# Altium PCB Enigma Rev A.PcbDoc
Units mm, origin at the board's own origin, x right, y up, seen from the top; angles counter-clockwise.
Board outline 230 x 115 mm, 4 copper layers (Component Side, Ground Plane, Power Plane, Solder Side), stack 0.844 mm thick; 1 components, 0 nets, 310 pads, 0 vias.
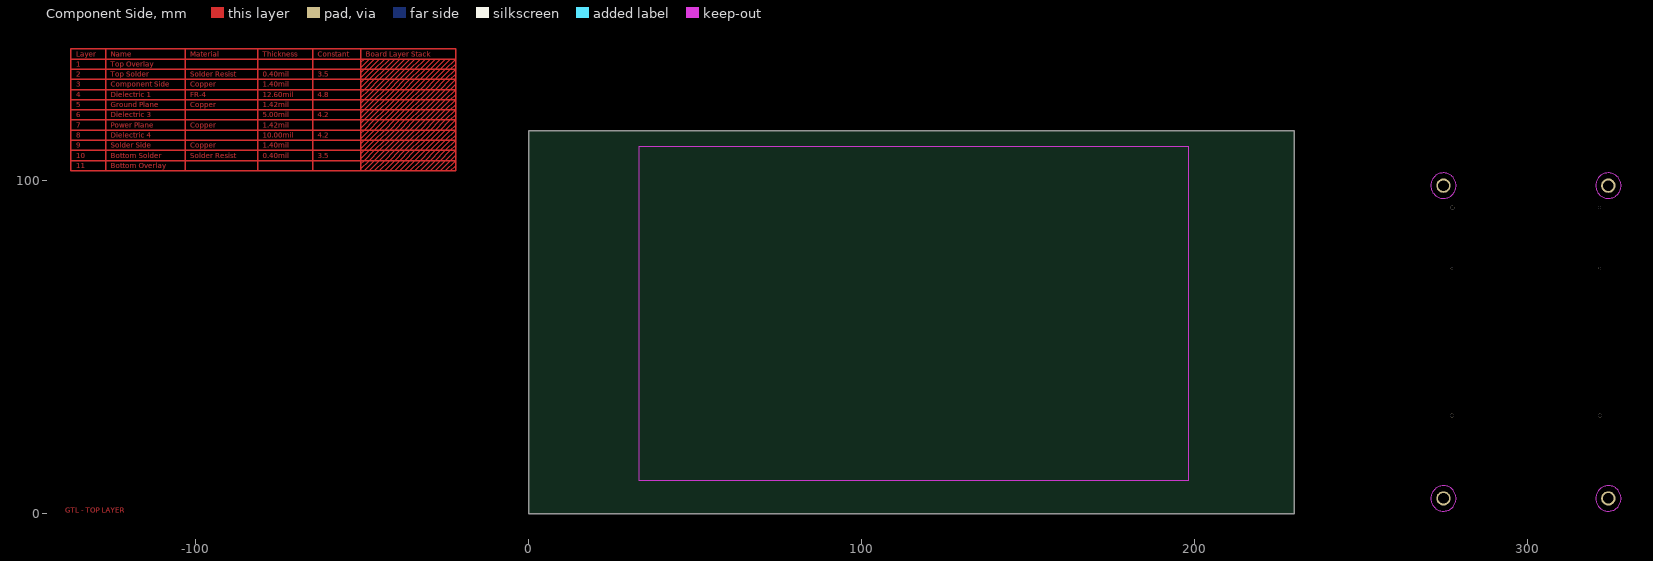
[diagram p0: Component Side view]
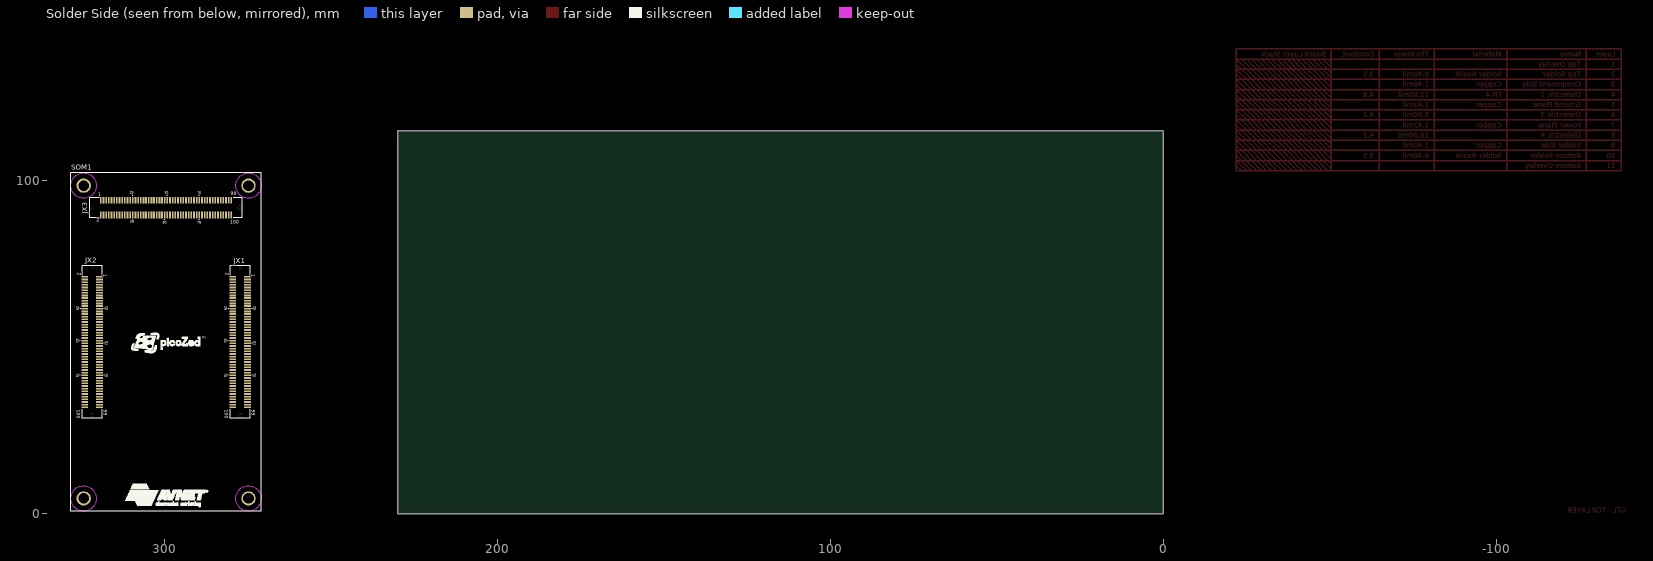
[diagram p1: Solder Side view, seen from below]
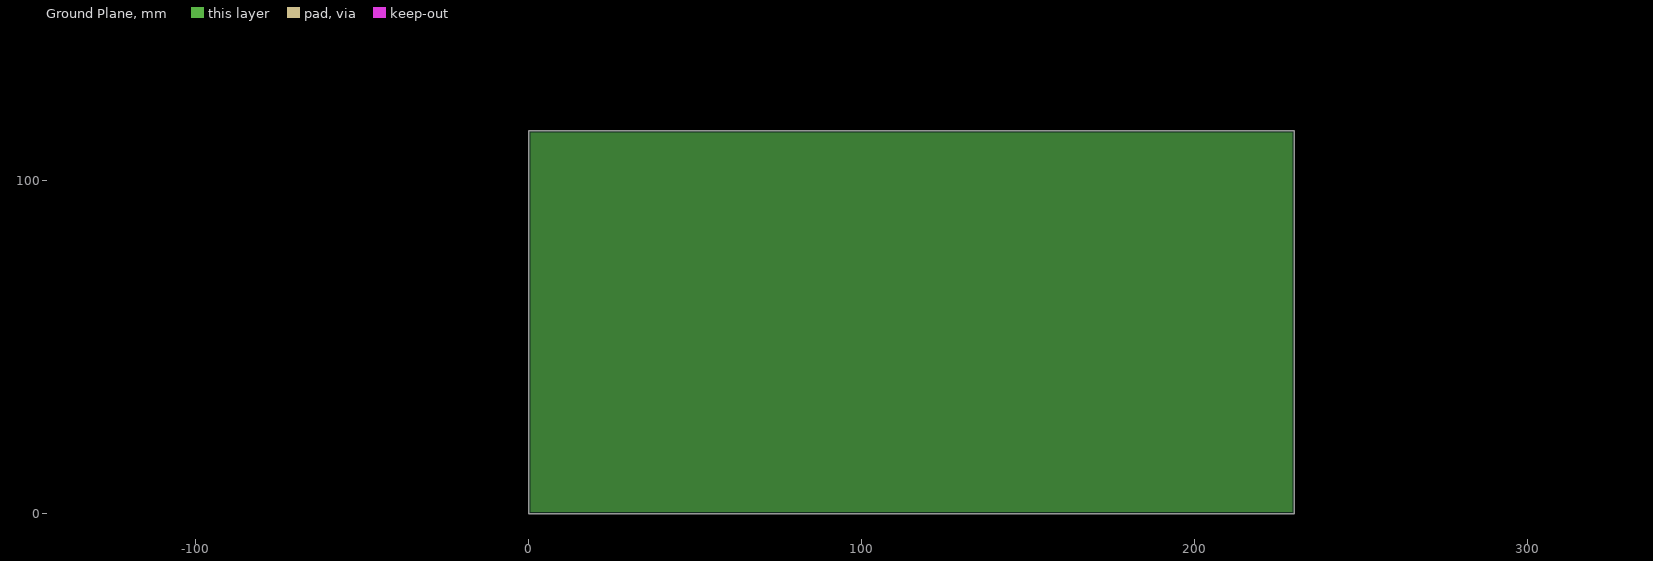
[diagram p2: Ground Plane, clearances drawn from the general rule]
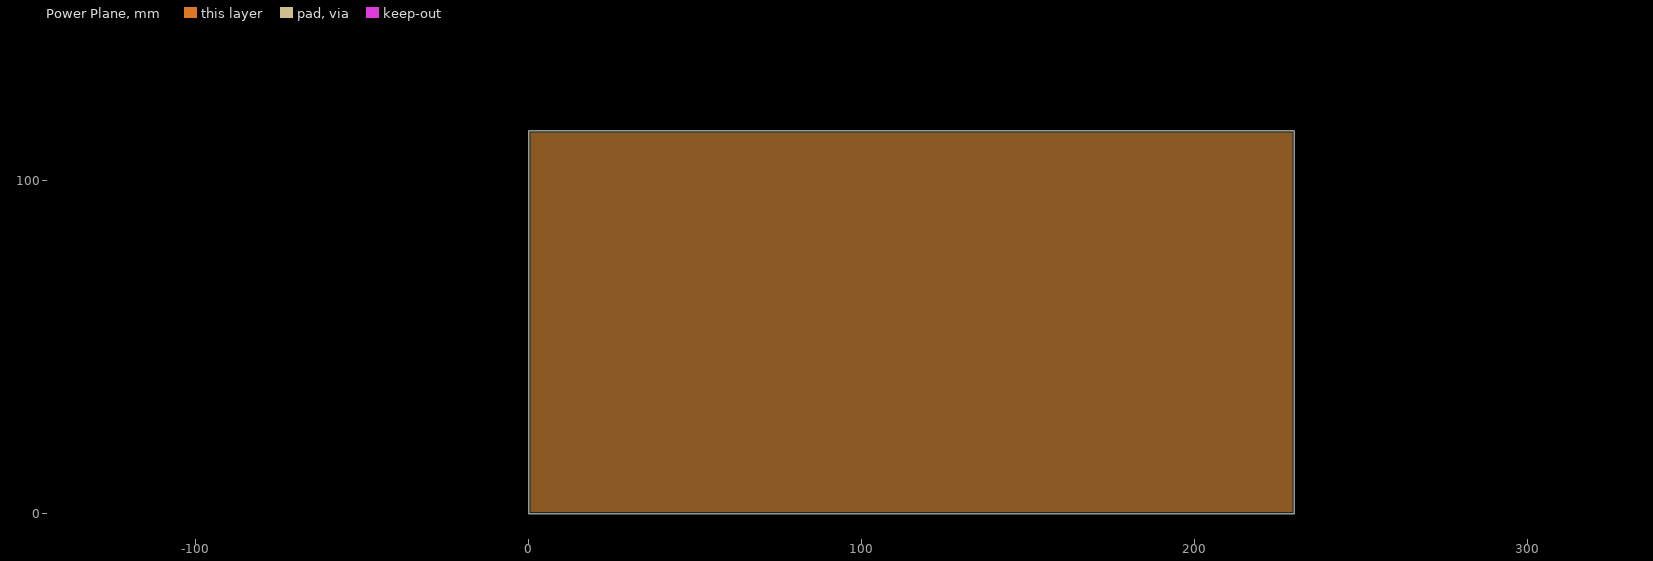
[diagram p3: Power Plane, clearances drawn from the general rule]

## Layer stack, top to bottom
Top Solder: solder mask 0.0102, Solder Resist, Dk 3.5
Component Side: signal copper 0.0356
Dielectric 1: core 0.32, FR-4, Dk 4.8
Ground Plane: plane copper 0.036
Dielectric 3: prepreg 0.127, Dk 4.2
Power Plane: plane copper 0.036
Dielectric 4: core 0.254, Dk 4.2
Solder Side: signal copper 0.0356
Bottom Solder: solder mask 0.0102, Solder Resist, Dk 3.5

## Board outline
0,0 230,0 230,115 0,115

## Design rules (kind name [scope] priority, off if disabled: settings)
Clearance [All] p1: gap=0.254 ignorepadtopadclearanceinfootprint=FALSE except(0: Arc-Hole Track-Hole SMDPad-Hole THPad-Hole Via-Hole Fill-Hole Poly-Hole Region-Hole Text-Hole)
PlaneClearance [All] p1: clearance=0.508
PlaneConnect [All] p1: planeconnectstyle=Relief reliefexpansion=0.508 reliefentries=4 reliefconductorwidth=0.254 reliefairgap=0.254
PolygonConnect [All] p1: connectstyle=Relief reliefconductorwidth=0.254 reliefentries=4 polygonreliefangle="90 Angle" airgapwidth=0.254
RoutingLayers [All] p1: top layer_v5=FALSE bottom layer_v5=TRUE
RoutingVias [All] p1: holewidth=0.711 width=1.27 viastyle="Through Hole" minholewidth=0.711 minwidth=1.27 maxholewidth=0.711 maxwidth=1.27
SolderMaskExpansion [All] p1: expansion=0.102
Width [All] p1: maxlimit=0.254 minlimit=0.254 preferedwidth=0.254
27 further rules are at their usual default settings.

## Components (designator, comment, footprint, x,y, rotation, side; value= is the part's Value field where it differs from the comment)
SOM1 "PicoZed" PicoZedSOM 328.14,0.72 r180 bottom

## Footprints (in the part's own frame and the unit in brackets; to place one, negate y for a bottom-side part, rotate by r counter-clockwise, add the part's x,y. Pads: shape width x height; smd on the part's side, far side on the other; paste and mask are expansions set on the pad)
PicoZedSOM [mil] "PicoZed SOM Footprint"
  round 170 hole 125: 0(150,150) 0(150,3850) 0(2100,150) 0(2100,3850)
  round 45.98 hole 47.99 unplated: 0(250.5,1130) 0(1995,3590) 0(2000.5,1130)
  round 30 hole 32.01 unplated: 0(250.5,2870) 0(255,3590) 0(2000.5,2870)
  rect 80x20 smd: JX1-1(2087.11,2771.65) JX1-2(1913.89,2771.65) JX1-3(2087.11,2740.16) JX1-4(1913.89,2740.16) JX1-5(2087.11,2708.66) JX1-6(1913.89,2708.66) JX1-7(2087.11,2677.17) JX1-8(1913.89,2677.17) JX1-9(2087.11,2645.67) JX1-10(1913.89,2645.67) JX1-11(2087.11,2614.17) JX1-12(1913.89,2614.17) JX1-13(2087.11,2582.68) JX1-14(1913.89,2582.68) JX1-15(2087.11,2551.18) JX1-16(1913.89,2551.18) JX1-17(2087.11,2519.68) JX1-18(1913.89,2519.69) JX1-19(2087.11,2488.19) JX1-20(1913.89,2488.19) JX1-21(2087.11,2456.69) JX1-22(1913.89,2456.69) JX1-23(2087.11,2425.2) JX1-24(1913.89,2425.2) JX1-25(2087.11,2393.7) JX1-26(1913.89,2393.7) JX1-27(2087.11,2362.2) JX1-28(1913.89,2362.21) JX1-29(2087.11,2330.71) JX1-30(1913.89,2330.71) JX1-31(2087.11,2299.21) JX1-32(1913.89,2299.21) JX1-33(2087.11,2267.72) JX1-34(1913.89,2267.72) JX1-35(2087.11,2236.22) JX1-36(1913.89,2236.22) JX1-37(2087.11,2204.72) JX1-38(1913.89,2204.73) JX1-39(2087.11,2173.23) JX1-40(1913.89,2173.23) JX1-41(2087.11,2141.73) JX1-42(1913.89,2141.73) JX1-43(2087.11,2110.24) JX1-44(1913.89,2110.24) JX1-45(2087.11,2078.74) JX1-46(1913.89,2078.74) JX1-47(2087.11,2047.24) JX1-48(1913.89,2047.25) JX1-49(2087.11,2015.75) JX1-50(1913.89,2015.75) JX1-51(2087.11,1984.25) JX1-52(1913.89,1984.25) JX1-53(2087.11,1952.76) JX1-54(1913.89,1952.76) JX1-55(2087.11,1921.26) JX1-56(1913.89,1921.26) JX1-57(2087.11,1889.76) JX1-58(1913.89,1889.77) JX1-59(2087.11,1858.27) JX1-60(1913.89,1858.27) JX1-61(2087.11,1826.77) JX1-62(1913.89,1826.77) JX1-63(2087.11,1795.28) JX1-64(1913.89,1795.28) JX1-65(2087.11,1763.78) JX1-66(1913.89,1763.78) JX1-67(2087.11,1732.28) JX1-68(1913.89,1732.29) JX1-69(2087.11,1700.79) JX1-70(1913.89,1700.79) JX1-71(2087.11,1669.29) JX1-72(1913.89,1669.29) JX1-73(2087.11,1637.8) JX1-74(1913.89,1637.8) JX1-75(2087.11,1606.3) JX1-76(1913.89,1606.3) JX1-77(2087.11,1574.8) JX1-78(1913.89,1574.81) JX1-79(2087.11,1543.31) JX1-80(1913.89,1543.31) JX1-81(2087.11,1511.81) JX1-82(1913.89,1511.81) JX1-83(2087.11,1480.31) JX1-84(1913.89,1480.32) JX1-85(2087.11,1448.82) JX1-86(1913.89,1448.82) JX1-87(2087.11,1417.32) JX1-88(1913.89,1417.33) JX1-89(2087.11,1385.83) JX1-90(1913.89,1385.83) JX1-91(2087.11,1354.33) JX1-92(1913.89,1354.33) JX1-93(2087.11,1322.83) JX1-94(1913.89,1322.84) JX1-95(2087.11,1291.34) JX1-96(1913.89,1291.34) JX1-97(2087.11,1259.84) JX1-98(1913.89,1259.85) JX1-99(2087.11,1228.35) JX1-100(1913.89,1228.35) JX2-1(337.11,2771.65) JX2-2(163.89,2771.65) JX2-3(337.11,2740.16) JX2-4(163.89,2740.16) JX2-5(337.11,2708.66) JX2-6(163.89,2708.66) JX2-7(337.11,2677.17) JX2-8(163.89,2677.17) JX2-9(337.11,2645.67) JX2-10(163.89,2645.67) JX2-11(337.11,2614.17) JX2-12(163.89,2614.17) JX2-13(337.11,2582.68) JX2-14(163.89,2582.68) JX2-15(337.11,2551.18) JX2-16(163.89,2551.18) JX2-17(337.11,2519.68) JX2-18(163.89,2519.69) JX2-19(337.11,2488.19) JX2-20(163.89,2488.19) JX2-21(337.11,2456.69) JX2-22(163.89,2456.69) JX2-23(337.11,2425.2) JX2-24(163.89,2425.2) JX2-25(337.11,2393.7) JX2-26(163.89,2393.7) JX2-27(337.11,2362.2) JX2-28(163.89,2362.21) JX2-29(337.11,2330.71) JX2-30(163.89,2330.71) JX2-31(337.11,2299.21) JX2-32(163.89,2299.21) JX2-33(337.11,2267.72) JX2-34(163.89,2267.72) JX2-35(337.11,2236.22) JX2-36(163.89,2236.22) JX2-37(337.11,2204.72) JX2-38(163.89,2204.73) JX2-39(337.11,2173.23) JX2-40(163.89,2173.23) JX2-41(337.11,2141.73) JX2-42(163.89,2141.73) JX2-43(337.11,2110.24) JX2-44(163.89,2110.24) JX2-45(337.11,2078.74) JX2-46(163.89,2078.74) JX2-47(337.11,2047.24) JX2-48(163.89,2047.25) JX2-49(337.11,2015.75) JX2-50(163.89,2015.75) JX2-51(337.11,1984.25) JX2-52(163.89,1984.25) JX2-53(337.11,1952.76) JX2-54(163.89,1952.76) JX2-55(337.11,1921.26) JX2-56(163.89,1921.26) JX2-57(337.11,1889.76) JX2-58(163.89,1889.77) JX2-59(337.11,1858.27) JX2-60(163.89,1858.27) JX2-61(337.11,1826.77) JX2-62(163.89,1826.77) JX2-63(337.11,1795.28) JX2-64(163.89,1795.28) JX2-65(337.11,1763.78) JX2-66(163.89,1763.78) JX2-67(337.11,1732.28) JX2-68(163.89,1732.29) JX2-69(337.11,1700.79) JX2-70(163.89,1700.79) JX2-71(337.11,1669.29) JX2-72(163.89,1669.29) JX2-73(337.11,1637.8) JX2-74(163.89,1637.8) JX2-75(337.11,1606.3) JX2-76(163.89,1606.3) JX2-77(337.11,1574.8) JX2-78(163.89,1574.81) JX2-79(337.11,1543.31) JX2-80(163.89,1543.31) JX2-81(337.11,1511.81) JX2-82(163.89,1511.81) JX2-83(337.11,1480.31) JX2-84(163.89,1480.32) JX2-85(337.11,1448.82) JX2-86(163.89,1448.82) JX2-87(337.11,1417.32) JX2-88(163.89,1417.33) JX2-89(337.11,1385.83) JX2-90(163.89,1385.83) JX2-91(337.11,1354.33) JX2-92(163.89,1354.33) JX2-93(337.11,1322.83) JX2-94(163.89,1322.84) JX2-95(337.11,1291.34) JX2-96(163.89,1291.34) JX2-97(337.11,1259.84) JX2-98(163.89,1259.85) JX2-99(337.11,1228.35) JX2-100(163.89,1228.35)
  rect 20x80 smd: JX3-1(353.35,3676.61) JX3-2(353.35,3503.39) JX3-3(384.84,3676.61) JX3-4(384.84,3503.39) JX3-5(416.34,3676.61) JX3-6(416.34,3503.39) JX3-7(447.83,3676.61) JX3-8(447.83,3503.39) JX3-9(479.33,3676.61) JX3-10(479.33,3503.39) JX3-11(510.83,3676.61) JX3-12(510.83,3503.39) JX3-13(542.32,3676.61) JX3-14(542.32,3503.39) JX3-15(573.82,3676.61) JX3-16(573.82,3503.39) JX3-17(605.31,3676.61) JX3-18(605.31,3503.39) JX3-19(636.81,3676.61) JX3-20(636.81,3503.39) JX3-21(668.31,3676.61) JX3-22(668.31,3503.39) JX3-23(699.8,3676.61) JX3-24(699.8,3503.39) JX3-25(731.3,3676.61) JX3-26(731.3,3503.39) JX3-27(762.8,3676.61) JX3-28(762.79,3503.39) JX3-29(794.29,3676.61) JX3-30(794.29,3503.39) JX3-31(825.79,3676.61) JX3-32(825.79,3503.39) JX3-33(857.28,3676.61) JX3-34(857.28,3503.39) JX3-35(888.78,3676.61) JX3-36(888.78,3503.39) JX3-37(920.28,3676.61) JX3-38(920.27,3503.39) JX3-39(951.77,3676.61) JX3-40(951.77,3503.39) JX3-41(983.27,3676.61) JX3-42(983.27,3503.39) JX3-43(1014.76,3676.61) JX3-44(1014.76,3503.39) JX3-45(1046.26,3676.61) JX3-46(1046.26,3503.39) JX3-47(1077.76,3676.61) JX3-48(1077.75,3503.39) JX3-49(1109.25,3676.61) JX3-50(1109.25,3503.39) JX3-51(1140.75,3676.61) JX3-52(1140.75,3503.39) JX3-53(1172.24,3676.61) JX3-54(1172.24,3503.39) JX3-55(1203.74,3676.61) JX3-56(1203.74,3503.39) JX3-57(1235.24,3676.61) JX3-58(1235.23,3503.39) JX3-59(1266.73,3676.61) JX3-60(1266.73,3503.39) JX3-61(1298.23,3676.61) JX3-62(1298.23,3503.39) JX3-63(1329.72,3676.61) JX3-64(1329.72,3503.39) JX3-65(1361.22,3676.61) JX3-66(1361.22,3503.39) JX3-67(1392.72,3676.61) JX3-68(1392.71,3503.39) JX3-69(1424.21,3676.61) JX3-70(1424.21,3503.39) JX3-71(1455.71,3676.61) JX3-72(1455.71,3503.39) JX3-73(1487.2,3676.61) JX3-74(1487.2,3503.39) JX3-75(1518.7,3676.61) JX3-76(1518.7,3503.39) JX3-77(1550.2,3676.61) JX3-78(1550.19,3503.39) JX3-79(1581.69,3676.61) JX3-80(1581.69,3503.39) JX3-81(1613.19,3676.61) JX3-82(1613.19,3503.39) JX3-83(1644.69,3676.61) JX3-84(1644.68,3503.39) JX3-85(1676.18,3676.61) JX3-86(1676.18,3503.39) JX3-87(1707.68,3676.61) JX3-88(1707.67,3503.39) JX3-89(1739.17,3676.61) JX3-90(1739.17,3503.39) JX3-91(1770.67,3676.61) JX3-92(1770.67,3503.39) JX3-93(1802.17,3676.61) JX3-94(1802.16,3503.39) JX3-95(1833.66,3676.61) JX3-96(1833.66,3503.39) JX3-97(1865.16,3676.61) JX3-98(1865.15,3503.39) JX3-99(1896.65,3676.61) JX3-100(1896.65,3503.39)
  Component Side keep-out circle w4: c2100,150 r150
  Component Side keep-out circle w4: c150,3850 r150
  Component Side keep-out circle w4: c2100,3850 r150
  Component Side keep-out circle w4: c150,150 r150
  Solder Side keep-out circle w4: c2100,150 r150
  Solder Side keep-out circle w4: c150,3850 r150
  Solder Side keep-out circle w4: c2100,3850 r150
  Solder Side keep-out circle w4: c150,150 r150
  silkscreen extent 0,0 2250,4000, body extent -1,0 2250,4000, height 186

## Part data
SOM1: library part PicoZed_SOM, "PicoZed SOM Carrier Footprint"

## Nets (pads, with @x,y where several pads share a name; then routed paths per layer and width w, separated by ;. In a path a pad name is that pad's centre, name@x,y a point inside that pad or via, vN(x,y) a via of type N, cw(c..) or ccw(c..) an arc to the next point about the centre after c; other vN are vias at no path point)
pads on no net: SOM1.0 SOM1.JX1-1 SOM1.JX1-2 SOM1.JX1-3 SOM1.JX1-4 SOM1.JX1-5 SOM1.JX1-6 SOM1.JX1-7 SOM1.JX1-8 SOM1.JX1-9 SOM1.JX1-10 SOM1.JX1-11 SOM1.JX1-12 SOM1.JX1-13 SOM1.JX1-14 SOM1.JX1-15 SOM1.JX1-16 SOM1.JX1-17 SOM1.JX1-18 SOM1.JX1-19 SOM1.JX1-20 SOM1.JX1-21 SOM1.JX1-22 SOM1.JX1-23 SOM1.JX1-24 SOM1.JX1-25 SOM1.JX1-26 SOM1.JX1-27 SOM1.JX1-28 SOM1.JX1-29 SOM1.JX1-30 SOM1.JX1-31 SOM1.JX1-32 SOM1.JX1-33 SOM1.JX1-34 SOM1.JX1-35 SOM1.JX1-36 SOM1.JX1-37 SOM1.JX1-38 SOM1.JX1-39 SOM1.JX1-40 SOM1.JX1-41 SOM1.JX1-42 SOM1.JX1-43 SOM1.JX1-44 SOM1.JX1-45 SOM1.JX1-46 SOM1.JX1-47 SOM1.JX1-48 SOM1.JX1-49 SOM1.JX1-50 SOM1.JX1-51 SOM1.JX1-52 SOM1.JX1-53 SOM1.JX1-54 SOM1.JX1-55 SOM1.JX1-56 SOM1.JX1-57 SOM1.JX1-58 SOM1.JX1-59 SOM1.JX1-60 SOM1.JX1-61 SOM1.JX1-62 SOM1.JX1-63 SOM1.JX1-64 SOM1.JX1-65 SOM1.JX1-66 SOM1.JX1-67 SOM1.JX1-68 SOM1.JX1-69 SOM1.JX1-70 SOM1.JX1-71 SOM1.JX1-72 SOM1.JX1-73 SOM1.JX1-74 SOM1.JX1-75 SOM1.JX1-76 SOM1.JX1-77 SOM1.JX1-78 SOM1.JX1-79 SOM1.JX1-80 SOM1.JX1-81 SOM1.JX1-82 SOM1.JX1-83 SOM1.JX1-84 SOM1.JX1-85 SOM1.JX1-86 SOM1.JX1-87 SOM1.JX1-88 SOM1.JX1-89 SOM1.JX1-90 SOM1.JX1-91 SOM1.JX1-92 SOM1.JX1-93 SOM1.JX1-94 SOM1.JX1-95 SOM1.JX1-96 SOM1.JX1-97 SOM1.JX1-98 SOM1.JX1-99 SOM1.JX1-100 SOM1.JX2-1 SOM1.JX2-2 SOM1.JX2-3 SOM1.JX2-4 SOM1.JX2-5 SOM1.JX2-6 SOM1.JX2-7 SOM1.JX2-8 SOM1.JX2-9 SOM1.JX2-10 SOM1.JX2-11 SOM1.JX2-12 SOM1.JX2-13 SOM1.JX2-14 SOM1.JX2-15 SOM1.JX2-16 SOM1.JX2-17 SOM1.JX2-18 SOM1.JX2-19 SOM1.JX2-20 SOM1.JX2-21 SOM1.JX2-22 SOM1.JX2-23 SOM1.JX2-24 SOM1.JX2-25 SOM1.JX2-26 SOM1.JX2-27 SOM1.JX2-28 SOM1.JX2-29 SOM1.JX2-30 SOM1.JX2-31 SOM1.JX2-32 SOM1.JX2-33 SOM1.JX2-34 SOM1.JX2-35 SOM1.JX2-36 SOM1.JX2-37 SOM1.JX2-38 SOM1.JX2-39 SOM1.JX2-40 SOM1.JX2-41 SOM1.JX2-42 SOM1.JX2-43 SOM1.JX2-44 SOM1.JX2-45 SOM1.JX2-46 SOM1.JX2-47 SOM1.JX2-48 SOM1.JX2-49 SOM1.JX2-50 SOM1.JX2-51 SOM1.JX2-52 SOM1.JX2-53 SOM1.JX2-54 SOM1.JX2-55 SOM1.JX2-56 SOM1.JX2-57 SOM1.JX2-58 SOM1.JX2-59 SOM1.JX2-60 SOM1.JX2-61 SOM1.JX2-62 SOM1.JX2-63 SOM1.JX2-64 SOM1.JX2-65 SOM1.JX2-66 SOM1.JX2-67 SOM1.JX2-68 SOM1.JX2-69 SOM1.JX2-70 SOM1.JX2-71 SOM1.JX2-72 SOM1.JX2-73 SOM1.JX2-74 SOM1.JX2-75 SOM1.JX2-76 SOM1.JX2-77 SOM1.JX2-78 SOM1.JX2-79 SOM1.JX2-80 SOM1.JX2-81 SOM1.JX2-82 SOM1.JX2-83 SOM1.JX2-84 SOM1.JX2-85 SOM1.JX2-86 SOM1.JX2-87 SOM1.JX2-88 SOM1.JX2-89 SOM1.JX2-90 SOM1.JX2-91 SOM1.JX2-92 SOM1.JX2-93 SOM1.JX2-94 SOM1.JX2-95 SOM1.JX2-96 SOM1.JX2-97 SOM1.JX2-98 SOM1.JX2-99 SOM1.JX2-100 SOM1.JX3-1 SOM1.JX3-2 SOM1.JX3-3 SOM1.JX3-4 SOM1.JX3-5 SOM1.JX3-6 SOM1.JX3-7 SOM1.JX3-8 SOM1.JX3-9 SOM1.JX3-10 SOM1.JX3-11 SOM1.JX3-12 SOM1.JX3-13 SOM1.JX3-14 SOM1.JX3-15 SOM1.JX3-16 SOM1.JX3-17 SOM1.JX3-18 SOM1.JX3-19 SOM1.JX3-20 SOM1.JX3-21 SOM1.JX3-22 SOM1.JX3-23 SOM1.JX3-24 SOM1.JX3-25 SOM1.JX3-26 SOM1.JX3-27 SOM1.JX3-28 SOM1.JX3-29 SOM1.JX3-30 SOM1.JX3-31 SOM1.JX3-32 SOM1.JX3-33 SOM1.JX3-34 SOM1.JX3-35 SOM1.JX3-36 SOM1.JX3-37 SOM1.JX3-38 SOM1.JX3-39 SOM1.JX3-40 SOM1.JX3-41 SOM1.JX3-42 SOM1.JX3-43 SOM1.JX3-44 SOM1.JX3-45 SOM1.JX3-46 SOM1.JX3-47 SOM1.JX3-48 SOM1.JX3-49 SOM1.JX3-50 SOM1.JX3-51 SOM1.JX3-52 SOM1.JX3-53 SOM1.JX3-54 SOM1.JX3-55 SOM1.JX3-56 SOM1.JX3-57 SOM1.JX3-58 SOM1.JX3-59 SOM1.JX3-60 SOM1.JX3-61 SOM1.JX3-62 SOM1.JX3-63 SOM1.JX3-64 SOM1.JX3-65 SOM1.JX3-66 SOM1.JX3-67 SOM1.JX3-68 SOM1.JX3-69 SOM1.JX3-70 SOM1.JX3-71 SOM1.JX3-72 SOM1.JX3-73 SOM1.JX3-74 SOM1.JX3-75 SOM1.JX3-76 SOM1.JX3-77 SOM1.JX3-78 SOM1.JX3-79 SOM1.JX3-80 SOM1.JX3-81 SOM1.JX3-82 SOM1.JX3-83 SOM1.JX3-84 SOM1.JX3-85 SOM1.JX3-86 SOM1.JX3-87 SOM1.JX3-88 SOM1.JX3-89 SOM1.JX3-90 SOM1.JX3-91 SOM1.JX3-92 SOM1.JX3-93 SOM1.JX3-94 SOM1.JX3-95 SOM1.JX3-96 SOM1.JX3-97 SOM1.JX3-98 SOM1.JX3-99 SOM1.JX3-100
copper on no net: | length 2642.9
  Component Side w0.025: -50.419,103.505 -47.887,106.037 -44.839,109.085 -41.791,112.133 -38.743,115.181 -35.695,118.229 -32.647,121.277 -29.599,124.325 -26.551,127.373 -23.503,130.421 -21.979,131.945 ; -50.419,105.029 -49.411,106.037 -46.363,109.085 -43.315,112.133 -40.267,115.181 -37.219,118.229 -34.171,121.277 -31.123,124.325 -28.075,127.373 -25.027,130.421 -21.979,133.469 ; -50.419,106.553 -47.887,109.085 -44.839,112.133 -41.791,115.181 -38.743,118.229 -35.695,121.277 -32.647,124.325 -29.599,127.373 -26.551,130.421 -23.503,133.469 -21.979,134.993 ; -50.419,108.077 -49.411,109.085 -46.363,112.133 -43.315,115.181 -40.267,118.229 -37.219,121.277 -34.171,124.325 -31.123,127.373 -28.075,130.421 -25.027,133.469 -21.979,136.517 ; -50.419,109.601 -47.887,112.133 -44.839,115.181 -41.791,118.229 -38.743,121.277 -35.695,124.325 -32.647,127.373 -29.599,130.421 -26.551,133.469 -23.503,136.517 ; -50.419,111.125 -49.411,112.133 -46.363,115.181 -43.315,118.229 -40.267,121.277 -37.219,124.325 -34.171,127.373 -31.123,130.421 -28.075,133.469 -25.027,136.517 ; -50.419,112.649 -47.887,115.181 -44.839,118.229 -41.791,121.277 -38.743,124.325 -35.695,127.373 -32.647,130.421 -29.599,133.469 -26.551,136.517 ; -50.419,114.173 -49.411,115.181 -46.363,118.229 -43.315,121.277 -40.267,124.325 -37.219,127.373 -34.171,130.421 -31.123,133.469 -28.075,136.517 ; -50.419,115.697 -47.887,118.229 -44.839,121.277 -41.791,124.325 -38.743,127.373 -35.695,130.421 -32.647,133.469 -29.599,136.517 ; -50.419,117.221 -49.411,118.229 -46.363,121.277 -43.315,124.325 -40.267,127.373 -37.219,130.421 -34.171,133.469 -31.123,136.517 ; -50.419,118.745 -47.887,121.277 -44.839,124.325 -41.791,127.373 -38.743,130.421 -35.695,133.469 -32.647,136.517 ; -50.419,120.269 -49.411,121.277 -46.363,124.325 -43.315,127.373 -40.267,130.421 -37.219,133.469 -34.171,136.517 ; -50.419,121.793 -47.887,124.325 -44.839,127.373 -41.791,130.421 -38.743,133.469 -35.695,136.517 ; -50.419,123.317 -49.411,124.325 -46.363,127.373 -43.315,130.421 -40.267,133.469 -37.219,136.517 ; -50.419,124.841 -47.887,127.373 -44.839,130.421 -41.791,133.469 -38.743,136.517 ; -50.419,126.365 -49.411,127.373 -46.363,130.421 -43.315,133.469 -40.267,136.517 ; -50.419,127.889 -47.887,130.421 -44.839,133.469 -41.791,136.517 ; -50.419,129.413 -49.411,130.421 -46.363,133.469 -43.315,136.517 ; -50.419,130.937 -47.887,133.469 -44.839,136.517 ; -50.419,132.461 -49.411,133.469 -46.363,136.517 ; -50.419,133.985 -47.887,136.517 ; -50.419,135.509 -49.411,136.517 ; -49.411,102.989 -46.363,106.037 -43.315,109.085 -40.267,112.133 -37.219,115.181 -34.171,118.229 -31.123,121.277 -28.075,124.325 -25.027,127.373 -21.979,130.421 ; -47.887,102.989 -44.839,106.037 -41.791,109.085 -38.743,112.133 -35.695,115.181 -32.647,118.229 -29.599,121.277 -26.551,124.325 -23.503,127.373 -21.979,128.897 ; -46.363,102.989 -43.315,106.037 -40.267,109.085 -37.219,112.133 -34.171,115.181 -31.123,118.229 -28.075,121.277 -25.027,124.325 -21.979,127.373 ; -44.839,102.989 -41.791,106.037 -38.743,109.085 -35.695,112.133 -32.647,115.181 -29.599,118.229 -26.551,121.277 -23.503,124.325 -21.979,125.849 ; -43.315,102.989 -40.267,106.037 -37.219,109.085 -34.171,112.133 -31.123,115.181 -28.075,118.229 -25.027,121.277 -21.979,124.325 ; -41.791,102.989 -38.743,106.037 -35.695,109.085 -32.647,112.133 -29.599,115.181 -26.551,118.229 -23.503,121.277 -21.979,122.801 ; -40.267,102.989 -37.219,106.037 -34.171,109.085 -31.123,112.133 -28.075,115.181 -25.027,118.229 -21.979,121.277 ; -38.743,102.989 -35.695,106.037 -32.647,109.085 -29.599,112.133 -26.551,115.181 -23.503,118.229 -21.979,119.753 ; -37.219,102.989 -34.171,106.037 -31.123,109.085 -28.075,112.133 -25.027,115.181 -21.979,118.229 ; -35.695,102.989 -32.647,106.037 -29.599,109.085 -26.551,112.133 -23.503,115.181 -21.979,116.705 ; -34.171,102.989 -31.123,106.037 -28.075,109.085 -25.027,112.133 -21.979,115.181 ; -32.647,102.989 -29.599,106.037 -26.551,109.085 -23.503,112.133 -21.979,113.657 ; -31.123,102.989 -28.075,106.037 -25.027,109.085 -21.979,112.133 ; -29.599,102.989 -26.551,106.037 -23.503,109.085 -21.979,110.609 ; -28.075,102.989 -25.027,106.037 -21.979,109.085 ; -26.551,102.989 -23.503,106.037 -21.979,107.561 ; -25.027,102.989 -21.979,106.037 ; -23.503,102.989 -21.979,104.513
  Component Side w0.381: -137.519,106.037 -127.107,106.037 -103.237,106.037 -81.399,106.037 -64.893,106.037 -50.419,106.037 -21.979,106.037 ; -137.519,109.085 -127.107,109.085 -103.237,109.085 -81.399,109.085 -64.893,109.085 -50.419,109.085 -21.979,109.085 ; -137.519,112.133 -127.107,112.133 -103.237,112.133 -81.399,112.133 -64.893,112.133 -50.419,112.133 -21.979,112.133 ; -137.519,115.181 -127.107,115.181 -103.237,115.181 -81.399,115.181 -64.893,115.181 -50.419,115.181 -21.979,115.181 ; -137.519,118.229 -127.107,118.229 -103.237,118.229 -81.399,118.229 -64.893,118.229 -50.419,118.229 -21.979,118.229 ; -137.519,121.277 -127.107,121.277 -103.237,121.277 -81.399,121.277 -64.893,121.277 -50.419,121.277 -21.979,121.277 ; -137.519,124.325 -127.107,124.325 -103.237,124.325 -81.399,124.325 -64.893,124.325 -50.419,124.325 -21.979,124.325 ; -137.519,127.373 -127.107,127.373 -103.237,127.373 -81.399,127.373 -64.893,127.373 -50.419,127.373 -21.979,127.373 ; -137.519,130.421 -127.107,130.421 -103.237,130.421 -81.399,130.421 -64.893,130.421 -50.419,130.421 -21.979,130.421 ; -137.519,133.469 -127.107,133.469 -103.237,133.469 -81.399,133.469 -64.893,133.469 -50.419,133.469 -21.979,133.469 ; -137.519,136.517 -21.979,136.517 ; -127.107,139.565 -127.107,102.989 ; -103.237,139.565 -103.237,102.989 ; -81.399,139.565 -81.399,102.989 ; -64.893,139.565 -64.893,102.989 ; -50.419,139.565 -50.419,102.989 ; -127.107,102.989 -103.237,102.989 ; -127.107,102.989 -137.519,102.989 -137.519,139.565 -21.979,139.565 -21.979,102.989 -50.419,102.989 ; -103.237,102.989 -81.399,102.989 ; -81.399,102.989 -64.893,102.989 ; -64.893,102.989 -50.419,102.989

## Polygon pours and split planes (outlines as drawn)
no net on Ground Plane (split plane): 229.49,114.49 229.49,0.51 0.51,0.51 0.51,114.49
no net on Power Plane (split plane): 229.49,114.49 229.49,0.51 0.51,0.51 0.51,114.49

## Keep-outs
Component Side:
  rectangle: 33,10 198.2,110.2

## Other copper
Component Side:
  text "Layer" at -135.995,137.279 h1.52
  text "Name" at -125.583,137.279 h1.52
  text "Material" at -101.713,137.279 h1.52
  text "Thickness" at -79.875,137.279 h1.52
  text "Constant" at -63.369,137.279 h1.52
  text "Board Layer Stack" at -48.895,137.279 h1.52
  text "1" at -135.995,134.231 h1.52
  text "Top Overlay" at -125.583,134.231 h1.52
  text "2" at -135.995,131.183 h1.52
  text "Top Solder" at -125.583,131.183 h1.52
  text "Solder Resist" at -101.713,131.183 h1.52
  text "0.40mil" at -79.875,131.183 h1.52
  text "3.5" at -63.369,131.183 h1.52
  text "3" at -135.995,128.135 h1.52
  text "Component Side" at -125.583,128.135 h1.52
  text "Copper" at -101.713,128.135 h1.52
  text "1.40mil" at -79.875,128.135 h1.52
  text "4" at -135.995,125.087 h1.52
  text "Dielectric 1" at -125.583,125.087 h1.52
  text "FR-4" at -101.713,125.087 h1.52
  text "12.60mil" at -79.875,125.087 h1.52
  text "4.8" at -63.369,125.087 h1.52
  text "5" at -135.995,122.039 h1.52
  text "Ground Plane" at -125.583,122.039 h1.52
  text "Copper" at -101.713,122.039 h1.52
  text "1.42mil" at -79.875,122.039 h1.52
  text "6" at -135.995,118.991 h1.52
  text "Dielectric 3" at -125.583,118.991 h1.52
  text "5.00mil" at -79.875,118.991 h1.52
  text "4.2" at -63.369,118.991 h1.52
  text "7" at -135.995,115.943 h1.52
  text "Power Plane" at -125.583,115.943 h1.52
  text "Copper" at -101.713,115.943 h1.52
  text "1.42mil" at -79.875,115.943 h1.52
  text "8" at -135.995,112.895 h1.52
  text "Dielectric 4" at -125.583,112.895 h1.52
  text "10.00mil" at -79.875,112.895 h1.52
  text "4.2" at -63.369,112.895 h1.52
  text "9" at -135.995,109.847 h1.52
  text "Solder Side" at -125.583,109.847 h1.52
  text "Copper" at -101.713,109.847 h1.52
  text "1.40mil" at -79.875,109.847 h1.52
  text "10" at -135.995,106.799 h1.52
  text "Bottom Solder" at -125.583,106.799 h1.52
  text "Solder Resist" at -101.713,106.799 h1.52
  text "0.40mil" at -79.875,106.799 h1.52
  text "3.5" at -63.369,106.799 h1.52
  text "11" at -135.995,103.751 h1.52
  text "Bottom Overlay" at -125.583,103.751 h1.52
  text "GTL - TOP LAYER" at -139.3,0.26 h1.52
Solder Side:
  text "GBL - BOTTOM LAYER" at -139.3,-20.24 h1.52
Ground Plane (plane layer: these items are gaps in the copper):
  text "GP1 - GROUND PLANE 1" at -138.938,-7.137 h1.52
Power Plane (plane layer: these items are gaps in the copper):
  text "GP2 - POWER PLANE 1" at -139.3,-9.74 h1.52
Multi-Layer:
  text "MULTI-LAYER HOLES" at -70.637,-40.361 h1.52

## Silkscreen, mask and mechanical layers (free items; w line width, h text height)
Mechanical 2:
  circle w0.152: c215.9,12.7 r2.54
  circle w0.152: c215.9,12.7 r5.08
  circle w0.152: c215.9,12.7 r7.62
  circle w0.152: c215.9,165.1 r2.54
  circle w0.152: c215.9,165.1 r5.08
  circle w0.152: c215.9,165.1 r7.62
  circle w0.152: c-114.3,165.1 r2.54
  circle w0.152: c-114.3,165.1 r5.08
  circle w0.152: c-114.3,165.1 r7.62
  lines w0.102: -127,165.1 -114.3,165.1 ; -114.3,152.4 -114.3,165.1 ; -114.3,177.8 -114.3,165.1 ; -101.6,165.1 -114.3,165.1 ; 203.2,12.7 215.9,12.7 ; 203.2,165.1 215.9,165.1 ; 215.9,0 215.9,12.7 ; 215.9,25.4 215.9,12.7 ; 215.9,152.4 215.9,165.1 ; 215.9,177.8 215.9,165.1 ; 228.6,12.7 215.9,12.7 ; 228.6,165.1 215.9,165.1
  text "02 PCB BOUNDRY" at -70.637,2.794 h1.52
Mechanical 3:
  text "03" at -70.637,0.254 h1.52
Mechanical 4:
  text "04" at -70.637,-2.286 h1.52
Mechanical 5:
  text "05" at -70.637,-4.826 h1.52
Mechanical 6:
  lines w0.508: -140.973,61.394 -46.223,61.394
  text "FAB NOTES: UNLESS OTHERWISE SPECIFIED" at -140.973,62.144 h1.52
  text "1) MATERIAL: GLASS EPOXY FR-4, UL 94V-0" at -141.045,58.554 h1.52
  text "2) FINISH - ENIG" at -141.045,55.011 h1.52
  text "3) HOLE DIAMETERS APPLY AFTER PLATING" at -141.021,51.976 h1.52
  text "4) SILKSREEN: WHITE EPOXY - BOTH SIDES" at -140.791,48.941 h1.52
  text "5) LAYER TO LAYER REGISTRATION: TO BE WITHIN +/- 0.003" at -140.791,45.906 h1.52
  text "6) ALL HOLES TO BE LOCATED WITHIN +/- 0.003 TRUE POSITION" at -140.791,42.871 h1.52
  text "7) TOLERANCES: .XX = +/- 0.02, .XXX = +/- 0.005" at -140.791,40.343 h1.52
  text "8) ALL DIMENSIONS IN INCHES" at -140.791,36.801 h1.52
  text "9) MIN TRACE WIDTH: 6MIL" at -140.791,33.765 h1.52
  text "10) MIN CLEARANCE: 6MIL" at -140.791,30.73 h1.52
  text "11) PLATE EDGE CONNECTORS PER IPC-6012 LATEST REVISION" at -140.791,27.695 h1.52
  text "12) OVERALL BOARD HEIGHT: 62MILS" at -140.791,24.66 h1.52
  text "15.) 20MIL PULLBACK ON INNER PLANES" at -140.791,21.625 h1.52
  text "06 FABRICATION NOTES" at -70.637,-7.366 h1.52
Mechanical 8:
  text "08" at -70.637,-12.446 h1.52
Mechanical 9:
  text "09" at -70.637,-14.986 h1.52
Mechanical 10:
  text "10" at -70.637,-17.526 h1.52
Mechanical 11:
  text "11 DESIGN INFORMATION" at -70.637,-20.066 h1.52
Mechanical 14:
  text "14" at -70.637,-27.686 h1.52
Mechanical 16:
  lines w0.051: -152.4,12.7 -144.78,12.7 ; -152.4,76.2 -144.78,76.2 ; -152.4,139.7 -144.78,139.7 ; -85.09,-50.8 -85.09,-43.18 ; -85.09,195.58 -85.09,203.2 ; -17.145,-50.8 -17.145,-43.18 ; -17.145,195.58 -17.145,203.2 ; 50.8,-50.8 50.8,-43.18 ; 50.8,195.58 50.8,203.2 ; 114.3,-43.18 114.3,-31.75 123.19,-31.75 ; 118.745,-50.8 118.745,-43.18 ; 118.745,195.58 118.745,203.2 ; 123.19,-43.18 123.19,-13.97 146.05,-13.97 ; 123.19,-36.83 246.38,-36.83 ; 123.19,-29.21 246.38,-29.21 ; 123.19,-21.59 146.05,-21.59 ; 146.05,-43.18 146.05,-13.97 ; 186.055,-50.8 186.055,-43.18 ; 196.85,-36.83 196.85,-29.21 ; 223.52,-36.83 223.52,-29.21 ; 246.38,-13.97 146.05,-13.97 ; 246.38,12.7 254,12.7 ; 246.38,139.7 254,139.7 ; -152.4,-50.8 -152.4,203.2 254,203.2 254,-50.8 -152.4,-50.8 ; -144.78,-43.18 -144.78,195.58 246.38,195.58 246.38,-43.18 -144.78,-43.18
  text "1" at -120.015,198.12 h2.29
  text "2" at -52.07,198.12 h2.29
  text "3" at 16.51,198.12 h2.29
  text "4" at 83.82,198.12 h2.29
  text "5" at 151.892,198.12 h2.29
  text "D" at 249.555,171.45 h2.29
  text "D" at -149.098,170.815 h2.29
  text "C" at -149.225,107.315 h2.29
  text "B" at 249.555,44.45 h2.29
  text "B" at -149.225,43.815 h2.29
  text ".DrawnBy" at 125.095,-17.145 h2.29
  text ".Company" at 147.605,-17.383 h2.29
  text "A" at 249.555,-19.05 h2.29
  text "A" at -149.098,-20.955 h2.29
  text ".Engineer" at 125.095,-24.765 h2.29
  text ".Project" at 147.955,-32.258 h2.29
  text ".Print_Date" at 199.644,-32.258 h2.29
  text ".Print_Date" at 125.095,-32.385 h2.29
  text ".Revision" at 224.663,-32.385 h2.29
  text "16 SHEET" at -70.637,-32.766 h1.52
  text "B" at 117.094,-38.227 h4.57
  text "1:1" at 125.222,-40.005 h2.29
  text ".Pcb_File_Name_No_Path" at 147.828,-40.005 h2.29
  text "1" at 238.275,-41.15 h2.29
  text "of" at 234.315,-41.275 h2.29
  text "Sheet" at 216.535,-41.402 h2.29
  text "1" at 226.35,-41.4 h2.29
  text "Size" at 115.57,-41.91 h2.29
  text "1" at -120.015,-48.26 h2.29
  text "2" at -52.07,-48.26 h2.29
  text "3" at 16.51,-48.26 h2.29
  text "4" at 83.82,-48.26 h2.29
  text "5" at 151.765,-48.26 h2.29
  text "6" at 219.71,-48.26 h2.29
Drill Drawing:
  circle w0.254: c88.576,160.486 r0.847
  lines w0.254: 87.729,153.712 89.423,153.712 88.576,152.019 87.729,153.712 ; 87.729,155.829 89.423,155.829 89.423,157.522 87.729,157.522 87.729,155.829
  lines w0.381: 86.211,150.876 184.737,150.876 ; 86.211,162.306 184.737,162.306 ; 100.203,147.066 100.203,166.116 ; 117.927,147.066 117.927,166.116 ; 152.106,147.066 152.106,166.116 ; 164.955,147.066 164.955,166.116 ; 86.211,147.066 184.737,147.066 184.737,166.116 86.211,166.116 86.211,147.066
  text "Symbol" at 88.497,163.449 h1.83
  text "Hit Count" at 101.346,163.449 h1.83
  text "Finished Hole Size" at 119.07,163.449 h1.83
  text "Plated" at 153.249,163.449 h1.83
  text "Hole Type" at 166.098,163.449 h1.83
  text "3" at 101.346,159.639 h1.52
  text "32.01mil (0.813mm)" at 119.07,159.639 h1.52
  text "NPTH" at 153.249,159.639 h1.52
  text "Round" at 166.098,159.639 h1.52
  text "3" at 101.346,155.829 h1.52
  text "47.99mil (1.219mm)" at 119.07,155.829 h1.52
  text "NPTH" at 153.249,155.829 h1.52
  text "Round" at 166.098,155.829 h1.52
  text "4" at 101.346,152.019 h1.52
  text "125.00mil (3.175mm)" at 119.07,152.019 h1.52
  text "PTH" at 153.249,152.019 h1.52
  text "Round" at 166.098,152.019 h1.52
  text "10 Total" at 101.346,148.209 h1.52

## Text inside footprints (layer, text, board x,y; h text height)
SOM1: Bottom Overlay "JX3" at 323.263,90.039 h1.52 r270; Bottom Overlay "100" at 280.261,87.118 h1.02; Bottom Overlay "99" at 280.184,95.627 h1.02; Bottom Overlay "2" at 320.418,87.588 h1.02; Bottom Overlay "1" at 319.935,95.285 h1.02; Bottom Overlay "25" at 310.446,95.995 h0.76; Bottom Overlay "26" at 310.269,87.359 h0.76; Bottom Overlay "51" at 299.905,95.995 h0.76; Bottom Overlay "75" at 290.203,95.868 h0.76; Bottom Overlay "76" at 290.203,87.105 h0.76; Bottom Overlay "50" at 300.617,87.105 h0.76; Bottom Overlay "50" at 282.128,52.572 h0.76 r90; Bottom Overlay "76" at 282.128,42.158 h0.76 r90; Bottom Overlay "75" at 273.365,42.158 h0.76 r90; Bottom Overlay "51" at 273.238,51.683 h0.76 r90; Bottom Overlay "26" at 281.874,62.224 h0.76 r90; Bottom Overlay "25" at 273.238,62.224 h0.76 r90; Bottom Overlay "1" at 273.948,71.891 h1.02 r90; Bottom Overlay "2" at 281.645,72.373 h1.02 r90; Bottom Overlay "99" at 273.873,31.236 h1.02 r90; Bottom Overlay "100" at 281.874,31.236 h1.02 r90; Bottom Overlay "100" at 326.324,31.236 h1.02 r90; Bottom Overlay "99" at 318.323,31.236 h1.02 r90; Bottom Overlay "2" at 326.095,72.373 h1.02 r90; Bottom Overlay "1" at 318.398,71.891 h1.02 r90; Bottom Overlay "25" at 317.688,62.224 h0.76 r90; Bottom Overlay "26" at 326.324,62.224 h0.76 r90; Bottom Overlay "51" at 317.688,51.683 h0.76 r90; Bottom Overlay "75" at 317.815,42.158 h0.76 r90; Bottom Overlay "76" at 326.578,42.158 h0.76 r90; Bottom Overlay "50" at 326.578,52.572 h0.76 r90; Bottom Overlay "JX2" at 323.822,75.32 h1.52; Bottom Overlay "JX1" at 279.194,75.218 h1.52; Bottom Overlay "TM" at 288.744,52.549 h0.38